# Altium PCB arduino_PCB.PcbDoc (part 2 of 2)
Units mm, origin at the board's own origin, x right, y up, seen from the top; angles counter-clockwise.
Board outline 68.58 x 53.34 mm, 2 copper layers (Top Layer, Bottom Layer); 106 components, 71 nets, 323 pads, 0 vias.
Unrouted connection lines stored in the file: 236.
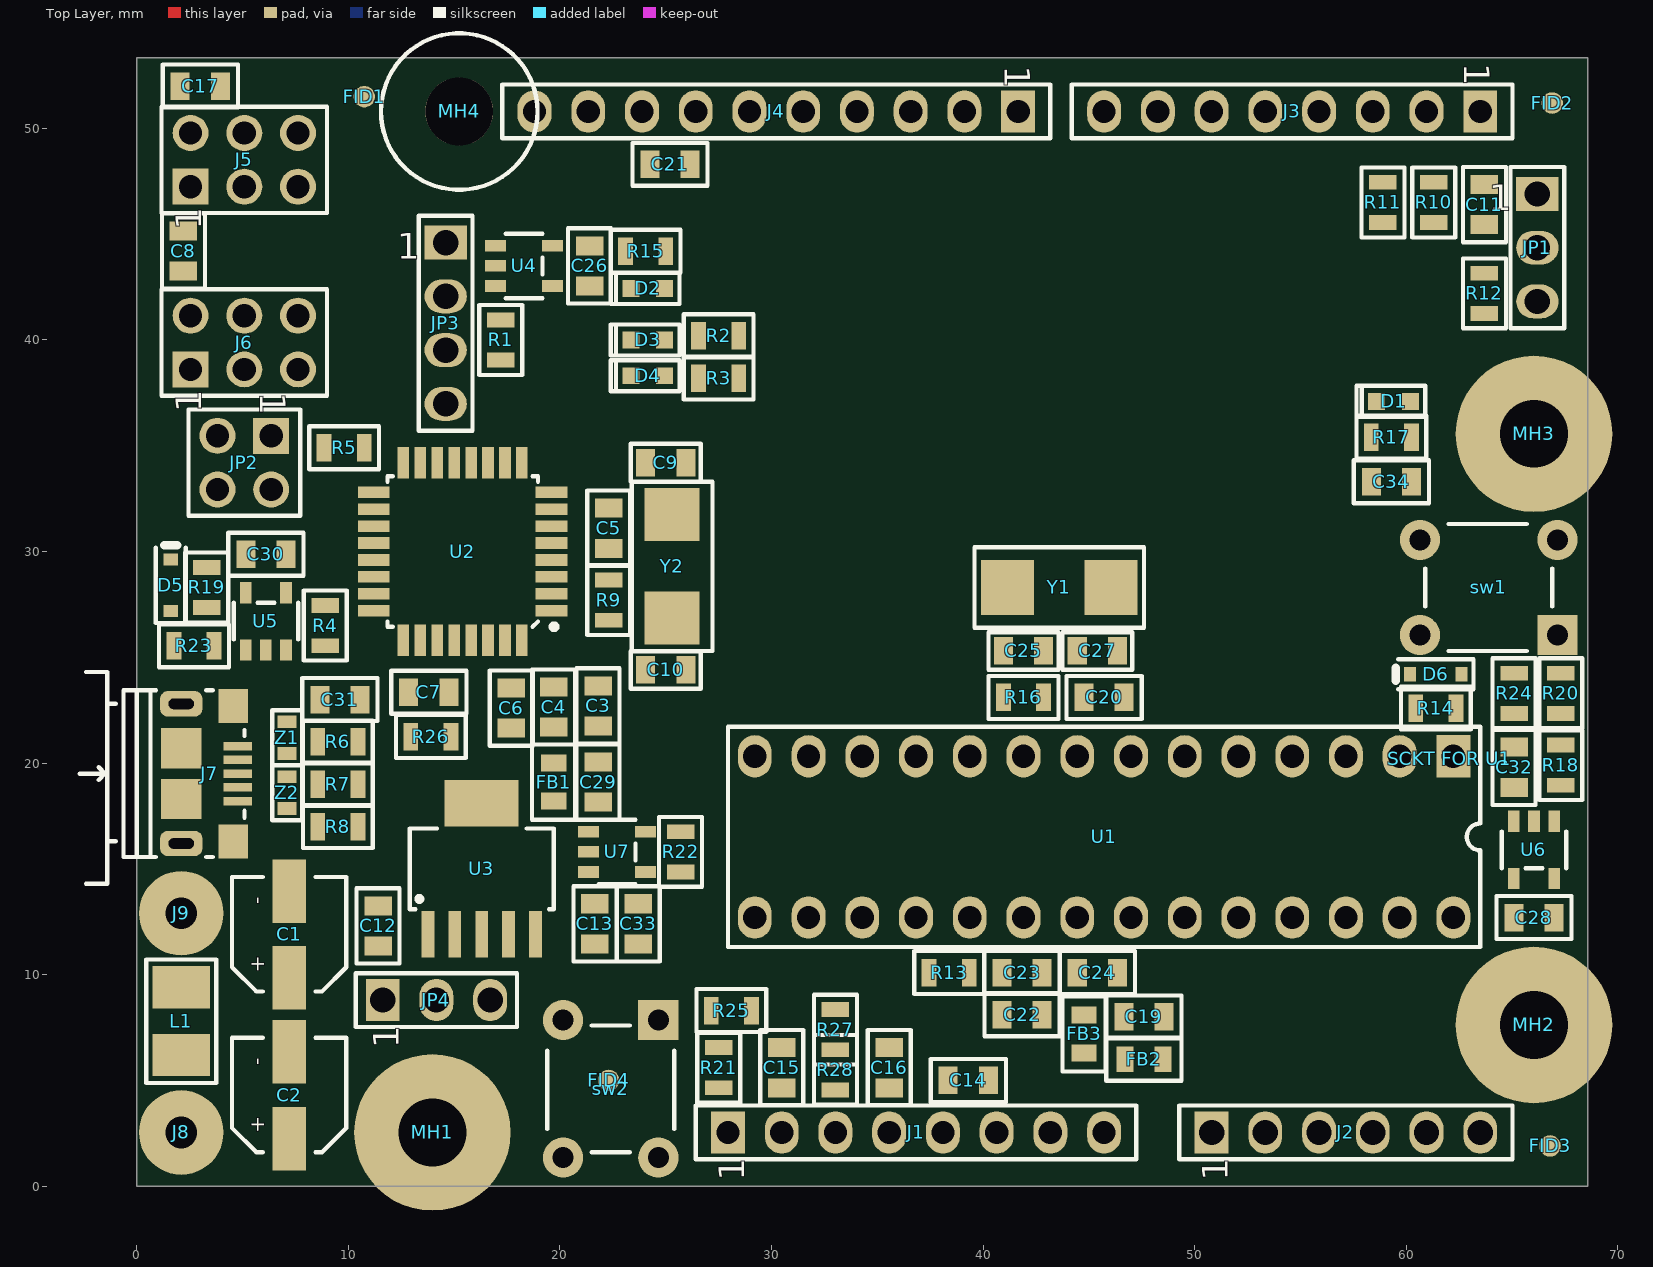
[diagram p0: Top Layer view]

## Part data (continued)
sw1 sw2: "6X6, H5,  160G TAC.SWITCH", Actuator Color=Black, Contact Current Rating=50mA, Contact Resistance=100mR, Manufacturer="TE Connectivity Alcoswitch", Max Operating Temperature=85°C, Max Voltage Rating (DC)=24V, Min Operating Temperature=-35°C, Operating Force=160gf, Package Quantity=750, Supplier Part Number 1=450-1650-ND, Actuator Length=0.055inch, Actuator Material=PBT, Actuator Type=Standard, Category="Switches,Tactile Switches", ComponentLink1Description=http://www.te.com/commerce/DocumentDelivery/DDEController?Action=srchrtrv&DocNm=1825910&DocType=Customer+Drawing&DocLang=English&src-supplier=Verical, ComponentLink1URL=http://www.te.com/commerce/DocumentDelivery/DDEController?Action=srchrtrv&DocNm=1825910&DocType=Customer+Drawing&DocLang=English&src-supplier=Verical, ComponentLink2Description=http://www.onlinecomponents.com/productFiles/mf-AMP/1825910-6rqpn1825910-6.pdf?src-supplier=Onlinecomponents.com, ComponentLink2URL=http://www.onlinecomponents.com/productFiles/mf-AMP/1825910-6rqpn1825910-6.pdf?src-supplier=Onlinecomponents.com, Contact Material="Copper Alloy", Contact Plating=Silver, Electrical Life=100000Cycles, ELV=Compliant, Illumination Type=Non-Illuminated,Illuminated, Lead Free="Lead Free", Length=5.99mm, Manufacturer Part Number=1825910-6, Max Current Rating=50mA, Mechanical Life=100000Cycles, Mount="Through Hole", Orientation=Straight, Packaging="Loose Piece", Pricing 1="1=0.11, 10=0.111, 25=0.1052, 100=0.0955, 250=0.0898, 500=0.08216, 1000=0.06879, 2500=0.06688, 5000=0.06306 (USD)", REACH SVHC=Unknown, RoHS Compliant=Yes, Series=FSMJ, Stock 1=141342, Supplier 1=Digi-Key, Switch Function=Off-Mom, Switch Travel=0.25mm, Termination="PC Pins", Throw Configuration=SPST, Type=Switch
U1: "IC MCU 8BIT 32KB FLASH 28DIP", Case/Package=PDIP, Frequency=20MHz, Manufacturer="Microchip / Atmel", Max Operating Temperature=85°C, Max Supply Voltage=5.5V, Min Operating Temperature=-40°C, Min Supply Voltage=1.8V, Package Quantity=14, Supplier Part Number 1=ATMEGA328P-PU-ND, Category="Integrated Circuits (ICs) Embedded - Microcontrollers", ComponentLink1Description=http://www.farnell.com/datasheets/2047852.pdf?src-supplier=Element14, ComponentLink1URL=http://www.farnell.com/datasheets/2047852.pdf?src-supplier=Element14, ComponentLink2Description=http://www.rapidonline.com/pdf/73-4283.pdf?src-supplier=Rapid+Electronics, ComponentLink2URL=http://www.rapidonline.com/pdf/73-4283.pdf?src-supplier=Rapid+Electronics, ComponentLink3Description=http://www.microchip.com/mymicrochip/filehandler.aspx?ddocname=en589968&src-supplier=Verical, ComponentLink3URL=http://www.microchip.com/mymicrochip/filehandler.aspx?ddocname=en589968&src-supplier=Verical, ComponentLink4Description=http://www.produktinfo.conrad.com/datenblaetter/150000-174999/155197-da-01-en-MICROCONTR_ATMEGA328P_PU_8BIT_PDIP_28.pdf?src-supplier=Conrad, ComponentLink4URL=http://www.produktinfo.conrad.com/datenblaetter/150000-174999/155197-da-01-en-MICROCONTR_ATMEGA328P_PU_8BIT_PDIP_28.pdf?src-supplier=Conrad, ComponentLink5Description=http://datasheet.iiic.cc/atmel/ATMEGA328P-PU.pdf?src-supplier=IIIC, ComponentLink5URL=http://datasheet.iiic.cc/atmel/ATMEGA328P-PU.pdf?src-supplier=IIIC, Contact Plating=Tin,Matte, Core Architecture=AVR, Data Bus Width=8b, Height=3.28mm, Interface=I2C,SPI,UART,USART,2-Wire, Lead Free="Lead Free", Length=37.4mm, Manufacturer Part Number=ATMEGA328P-PU, Max Frequency=20MHz, Memory Size=32KB, Memory Type=FLASH, Mount="Through Hole", Number of ADC Channels=6, Number of I2C Channels=1, Number of I/Os=23, Number of Pins=28, Number of Programmable I/O=23, Number of PWM Channels=6, Number of SPI Channels=1, Number of Timers/Counters=3, Oscillator Type=Internal, Packaging=Rail/Tube, Peripherals="Brown-out Detect/Reset,POR,PWM,WDT", Pricing 1="1=2.63, 25=2.4152, 100=2.19 (USD)", Radiation Hardening=No, RAM Size=2KB, REACH SVHC="No SVHC", RoHS Compliant=Yes, Series="AVR® ATmega", Stock 1=35967, Supplier 1=Digi-Key, Watchdog Timer=Yes, Width=6.76mm
U2: "IC MCU 8BIT 16KB FLASH 32TQFP", Case/Package=TQFP, Frequency=16MHz, Manufacturer=Microchip, Max Operating Temperature=85°C, Min Operating Temperature=-40°C, Supplier Part Number 1=ATMEGA16U2-AU-ND, Category="Integrated Circuits (ICs) Embedded - Microcontrollers", Core Architecture=AVR, Interface=SPI,USB,UART,USART, Manufacturer Part Number=ATMEGA16U2-AU, Memory Size=16KB, Memory Type=FLASH, Number of I/Os=22, Number of Pins=32, Oscillator Type=Internal, Packaging=Tray, Peripherals="Brown-out Detect/Reset,POR,PWM,WDT", Pricing 1="1=3.16, 25=2.9096, 100=2.6335 (USD)", RoHS Compliant=Yes, Stock 1=8933, Supplier 1=Digi-Key
U3: "IC REG LINEAR 3.3V 1.5A SOT223-6", Case/Package=SOT-223, Dropout Voltage=340mV, Input Bias Current=1mA, Manufacturer="Texas Instruments", Max Input Voltage=20V, Max Operating Temperature=125°C, Max Output Current=1.5A, Max Output Voltage=3.3V, Min Current Limit=1.6A, Min Input Voltage=2.1V, Min Operating Temperature=-40°C, Package Quantity=1, Supplier Part Number 1=296-24534-6-ND, Accuracy=3%, Category="Integrated Circuits (ICs) PMIC - Voltage Regulators - Linear", ComponentLink1Description=http://www.ti.com/lit/ds/symlink/tl1963a.pdf?src-supplier=Digi-Key, ComponentLink1URL=http://www.ti.com/lit/ds/symlink/tl1963a.pdf?src-supplier=Digi-Key, ComponentLink2Description=http://www.ti.com/lit/ds/symlink/tl1963a.pdf?src-supplier=Avnet+Europe, ComponentLink2URL=http://www.ti.com/lit/ds/symlink/tl1963a.pdf?src-supplier=Avnet+Europe, Contact Plating=Gold, Lead Free="Lead Free", Manufacturer Part Number=TL1963A-33DCQR, Min Output Voltage=3.3V, Number of Outputs=1, Number of Pins=6, Number of Regulators=1, Output Current=1.5A, Output Type=Fixed, Output Voltage=3.3V, Packaging="Tape and Reel", Polarity=Positive, Pricing 1="1=3.59, 10=3.222, 25=3.0456, 100=2.6396, 250=2.5042, 500=2.247, 1000=2.23475 (USD)", Quiescent Current=1mA, Radiation Hardening=No, RoHS Compliant=Yes, Series=-, Stock 1=0, Supplier 1=Digi-Key
U4 U5 U6 U7: library part SN74AHC1G09DBVR, "TEXAS INSTRUMENTS - SN74AHC1G09DBVR - AND Gate, 74AHC1G09, 2 Input, 2 V to 5.5 V, SOT-23-5", Case/Package=SOT-23, Low Level Output Current=8mA, Manufacturer="Texas Instruments", Max Operating Temperature=125°C, Max Supply Voltage=5.5V, Min Operating Temperature=-55°C, Min Supply Voltage=2V, Output Current=25mA, Package Quantity=3000, Quiescent Current=1uA, Supplier Part Number 1=296-29202-6-ND, Category="Integrated Circuits (ICs) Logic - Gates and Inverters", ComponentLink1Description=http://www.ti.com/lit/ds/symlink/sn74ahc1g09.pdf?src-supplier=Digi-Key, ComponentLink1URL=http://www.ti.com/lit/ds/symlink/sn74ahc1g09.pdf?src-supplier=Digi-Key, Contact Plating=Tin,Matte, Lead Free="Lead Free", Logic Function="AND GATE", Manufacturer Part Number=SN74AHC1G09DBVR, Mount="Surface Mount", Number of Bits=1, Number of Circuits=1, Number of Elements=1, Number of Gates=1, Number of Inputs=2, Number of Outputs=1, Number of Pins=5, Output Voltage=5.5V, Packaging="Tape and Reel", Pricing 1="1=0.48, 10=0.356, 25=0.3116, 100=0.2017, 250=0.16696, 500=0.13356, 1000=0.1024 (USD)", Propagation Delay=7.5ns, Radiation Hardening=No, REACH SVHC="No SVHC", RoHS Compliant=Yes, Series=74AHC, Stock 1=0, Supplier 1=Digi-Key, Technology=CMOS
Y1 Y2: "CRYSTAL 16.0000MHZ 18PF SMD", Case/Package=CSMD, ESR (Equivalent Series Resistance)=50R, Frequency=16MHz, Frequency Stability=30ppm, Frequency Tolerance=20ppm, Load Capacitance=18pF, Manufacturer=Abracon, Max Operating Temperature=85°C, Min Operating Temperature=-40°C, Operating Frequency="16 MHz", Package Quantity=1000, Resistor Type=Ceramic, Supplier Part Number 1=535-9840-1-ND, Category="Crystals, Oscillators, Resonators Crystals", ComponentLink1Description=http://www.abracon.com/Resonators/abm7.pdf?src-supplier=Farnell, ComponentLink1URL=http://www.abracon.com/Resonators/abm7.pdf?src-supplier=Farnell, ComponentLink2Description=http://www.farnell.com/datasheets/947971.pdf?src-supplier=Element14, ComponentLink2URL=http://www.farnell.com/datasheets/947971.pdf?src-supplier=Element14, ComponentLink3Description=https://abracon.com/Resonators/abm7.pdf?src-supplier=Digi-Key, ComponentLink3URL=https://abracon.com/Resonators/abm7.pdf?src-supplier=Digi-Key, ComponentLink4Description=https://www.verical.com/server-webapp/html/getDatasheet?partID=721624&src-supplier=Verical, ComponentLink4URL=https://www.verical.com/server-webapp/html/getDatasheet?partID=721624&src-supplier=Verical, ComponentLink5Description=http://www.abracon.com/Resonators/abm7.pdf?src-supplier=Future+Electronics, ComponentLink5URL=http://www.abracon.com/Resonators/abm7.pdf?src-supplier=Future+Electronics, ComponentLink6Description=http://www.abracon.com/Support/PackageDrawing/Resonators/ABM7.PDF?src-supplier=Verical, ComponentLink6URL=http://www.abracon.com/Support/PackageDrawing/Resonators/ABM7.PDF?src-supplier=Verical, Depth=3.5mm, Height=0.055inch, Lead Free="Lead Free", Length=6mm, Manufacturer Part Number=ABM7-16.000MHZ-D2Y-T, Mount="Surface Mount", Number of Pins=2, Packaging="Tape and Reel", Pricing 1="1=0.87, 10=0.773, 50=0.7224, 100=0.6384, 500=0.6048 (USD)", Radiation Hardening=No, REACH SVHC=Unknown, Series=ABM7, Stock 1=0, Supplier 1=Digi-Key, Termination=SMD/SMT, Tolerance=20ppm, Width=3.3mm
Z1 Z2: "VARISTOR 0603", Capacitance=0.5pF, Case Code (Imperial)=0603, Case Code (Metric)=1608, Clamping Voltage=20V, Current Rating=50nA, Manufacturer=Bourns, Max Operating Temperature=85°C, Max Voltage Rating (DC)=5V, Min Operating Temperature=-40°C, Package Quantity=1, Supplier Part Number 1=CG0603MLC-05EDKR-ND, Voltage Rating (AC)=8V, Case/Package=0603, Category="Circuit Protection TVS - Varistors, MOVs", ComponentLink1Description=http://www.jameco.com/Jameco/Products/ProdDS/1163231.pdf?src-supplier=Jameco, ComponentLink1URL=http://www.jameco.com/Jameco/Products/ProdDS/1163231.pdf?src-supplier=Jameco, ComponentLink2Description=http://www.farnell.com/datasheets/2360367.pdf?src-supplier=Element14, ComponentLink2URL=http://www.farnell.com/datasheets/2360367.pdf?src-supplier=Element14, ComponentLink3Description=http://www.bourns.com/docs/Product-Datasheets/MLC.pdf?src-supplier=Avnet, ComponentLink3URL=http://www.bourns.com/docs/Product-Datasheets/MLC.pdf?src-supplier=Avnet, ComponentLink4Description=http://www.bourns.com/docs/Product-Datasheets/MLC.pdf?src-supplier=Avnet+Europe, ComponentLink4URL=http://www.bourns.com/docs/Product-Datasheets/MLC.pdf?src-supplier=Avnet+Europe, ComponentLink5Description=https://www.bourns.com/docs/Product-Datasheets/MLC.pdf?src-supplier=Digi-Key, ComponentLink5URL=https://www.bourns.com/docs/Product-Datasheets/MLC.pdf?src-supplier=Digi-Key, Contact Plating=Tin, Depth=0.8mm, Element Configuration=Single, Leakage Current=50nA, Length=1.6mm, Manufacturer Part Number=CG0603MLC-05E, Number of Channels=1, Number of Circuits=1, Number of Pins=2, Operating Supply Voltage=5V, Packaging="Tape and Reel", Pricing 1="1=0.49, 10=0.348, 25=0.286, 100=0.2288, 250=0.1664, 500=0.1352, 1000=0.104, 2500=0.0936 (USD)", Radiation Hardening=No, REACH SVHC="No SVHC", RoHS Compliant=Yes, Series=MLC, Stock 1=116684, Supplier 1=Digi-Key, Termination=SMD/SMT, Thickness=0.8mm, Turn-On Delay Time=1ns, Voltage=5V, Voltage Rating (DC)=5V, Width=0.8mm, Working Voltage=5V

## Nets (pads, with @x,y where several pads share a name; then routed paths per layer and width w, separated by ;. In a path a pad name is that pad's centre, name@x,y a point inside that pad or via, vN(x,y) a via of type N, cw(c..) or ccw(c..) an arc to the next point about the centre after c; other vN are vias at no path point)
16U2_16MHZ_XTAL1: C10.2 R9.2 U2.1 Y2.1
16U2_16MHZ_XTAL2: C9.2 R9.1 U2.2 Y2.2
16U2_BUF_RESETn: C31.2 R23.2 U5.1 U5.2
16U2_HDR_RESETn: J6.5 JP3.3
16U2_MISO: J6.1 U2.17
16U2_MOSI: J6.4 U2.16
16U2_PB4: JP2.1 JP3.2 U2.18
16U2_PB5: JP2.3 U2.19
16U2_PB6: JP2.2 U2.20
16U2_PB7: JP2.4 U2.21
16U2_RESETn: JP3.4 R4.1 U2.24 U5.4
16U2_RX_LED: D4.1 U2.10
16U2_RXD: R11.1 U2.8
16U2_SCLK: J6.3 R5.2
16U2_SCLK_R: R5.1 U2.15
16U2_TX_LED: D3.1 U2.11
16U2_TXD: R10.1 U2.9
16U2PROG_328P_RESETn: JP1.2 R1.1 U2.13
328P_16MHZ_XTAL1: C27.2 R16.2 U1.9 Y1.1
328P_16MHZ_XTAL2: C25.2 R16.1 U1.10 Y1.2
328P_AUTORESETn: C11.2 R18.1 U6.1
328P_BUF_RESETn: C32.2 R24.2 U6.2
328P_RESETn: J1.3 J5.5 JP3.1 R14.1 U1.1 U6.4
+3V3: C13.2 C16.2 J1.4 JP4.3 R28.2 U3.4 U3.5
+3V3_16U2_UCAP: C7.2 R26.1 U2.27
+5V: C2.1 C6.2 C12.2 C14.2 J1.5 J8.1 JP4.1 L1.2 R27.1 U2.31 U3.1 U3.2
+5V/3v3: C8.2 C15.2 C17.2 C26.2 C28.2 C29.2 C30.2 C34.2 D5.1 D6.1 FB1.1 FB2.1 FB3.2 J1.2 J5.2 J6.2 JP4.2 R1.2 R2.2 R3.2 R4.2 R14.2 R15.2 R17.2 R18.2 R19.2 R20.2 R21.2 R27.2 R28.1 U4.5 U5.5 U6.5 U7.5
+5V/3V3_16U2: C3.2 C4.2 C5.2 FB1.2 R26.2 U2.4 U2.32
+5V/3V3_328P_AVCC: C22.2 C23.2 FB3.1 U1.20
+5V/3V3_328P_VCC: C19.2 C20.2 FB2.2 U1.7
+5V_USB: C1.1 J7.1 L1.1
+AREF: C21.2 C24.2 J4.8 U1.21
AD0: J2.1 U1.23
AD1: J2.2 U1.24
AD2: J2.3 U1.25
AD3: J2.4 U1.26
AD4/SDA: J2.5 J4.9 U1.27
AD5/SCL: J2.6 J4.10 U1.28
BUTTON_RESETn: D6.2 R20.1 R24.1 sw1.1 sw1.2
CON_USB_N: J7.2 R6.1 Z1.2
CON_USB_P: J7.3 R7.1 Z2.2
GND: C1.2 C2.2 C3.1 C4.1 C5.1 C6.1 C7.1 C8.1 C9.1 C10.1 C12.1 C13.1 C14.1 C15.1 C16.1 C17.1 C19.1 C20.1 C21.1 C22.1 C23.1 C24.1 C25.1 C26.1 C27.1 C28.1 C29.1 C30.1 C31.1 C32.1 C33.1 C34.1 D1.1 J1.6 J1.7 J4.7 J5.6 J6.6 J7.5 J7.6 J7.7 J7.8 J7.9 J7.10 J7.11 J9.1 MH1.1 MH2.1 MH3.1 R8.2 R12.1 sw1.3 sw1.4 sw2.3 sw2.4 U1.8 U1.22 U2.3 U2.28 U3.3 U3.6 U4.3 U5.3 U6.3 U7.3 Z1.1 Z2.1
IO0: J3.1 R10.2 U1.2
IO1: J3.2 R11.2 U1.3
IO2: J3.3 U1.4
IO3: J3.4 U1.5
IO4: J3.5 U1.6
IO5: J3.6 U1.11
IO6: J3.7 U1.12
IO7: J3.8 U1.13
IO8: J4.1 R22.2 U1.14
IO9: J4.2 U1.15
MISO: J4.5 J5.1 U1.18
MOSI: J4.4 J5.4 U1.17
NetC11_1: C11.1 JP1.1
NetD1_2: D1.2 R17.1
NetD2_1: D2.1 U4.4
NetD2_2: D2.2 R15.1
NetD3_2: D3.2 R2.1
NetD4_2: D4.2 R3.1
NetD5_2: D5.2 R19.1 R23.1
NetJ7_4: J7.4 R8.1
NetJP1_3: JP1.3 R12.2
NetR22_1: R22.1 U7.4
SCK: J4.6 J5.3 R13.2 U4.1 U4.2
SCK_R: R13.1 U1.19
SS: J4.3 U1.16
USB_N: R6.2 U2.30
USB_P: R7.2 U2.29
USER_BUTTON: R21.1 R25.1 sw2.1 sw2.2
USER_BUTTON_BUF: C33.2 R25.2 U7.1 U7.2
pads on no net: FID1.1 FID2.1 FID3.1 FID4.1 J1.1 J1.8 MH4.1 U2.5 U2.6 U2.7 U2.12 U2.14 U2.22 U2.23 U2.25 U2.26

## Silkscreen, mask and mechanical layers (free items; w line width, h text height)
Bottom Board Outline:
  the board outline again, w0.3

## Text inside footprints (layer, text, board x,y; h text height)
C1: Top Overlay "+" at 6.032,10.097 h0.7 r90; Top Overlay "-" at 6.006,13.322 h0.7 r90; Mechanical 29 "+" at 6.032,10.097 h0.7 r90; Mechanical 29 "-" at 6.006,13.322 h0.7 r90
C2: Top Overlay "+" at 6.032,2.497 h0.7 r90; Top Overlay "-" at 6.006,5.722 h0.7 r90; Mechanical 29 "+" at 6.032,2.497 h0.7 r90; Mechanical 29 "-" at 6.006,5.722 h0.7 r90
J1: Top Overlay "1" at 28.702,0.254 h1.2 r90
J2: Top Overlay "1" at 51.562,0.254 h1.2 r90
J3: Top Overlay "1" at 62.738,53.086 h1.2 r270
J4: Top Overlay "1" at 41.021,52.959 h1.2 r270
J5: Top Overlay "1" at 3.048,45.212 h1.2 r90
J6: Top Overlay "1" at 3.048,36.576 h1.2 r90
JP1: Top Overlay "1" at 63.914,46.138 h1.2
JP2: Top Overlay "1" at 5.842,37.502 h1.2 r270
JP3: Top Overlay "1" at 12.314,43.838 h1.2
JP4: Top Overlay "1" at 12.382,6.514 h1.2 r90